# EAGLE board Temperature_sensor_Tiled (EAGLE 7.7.0)
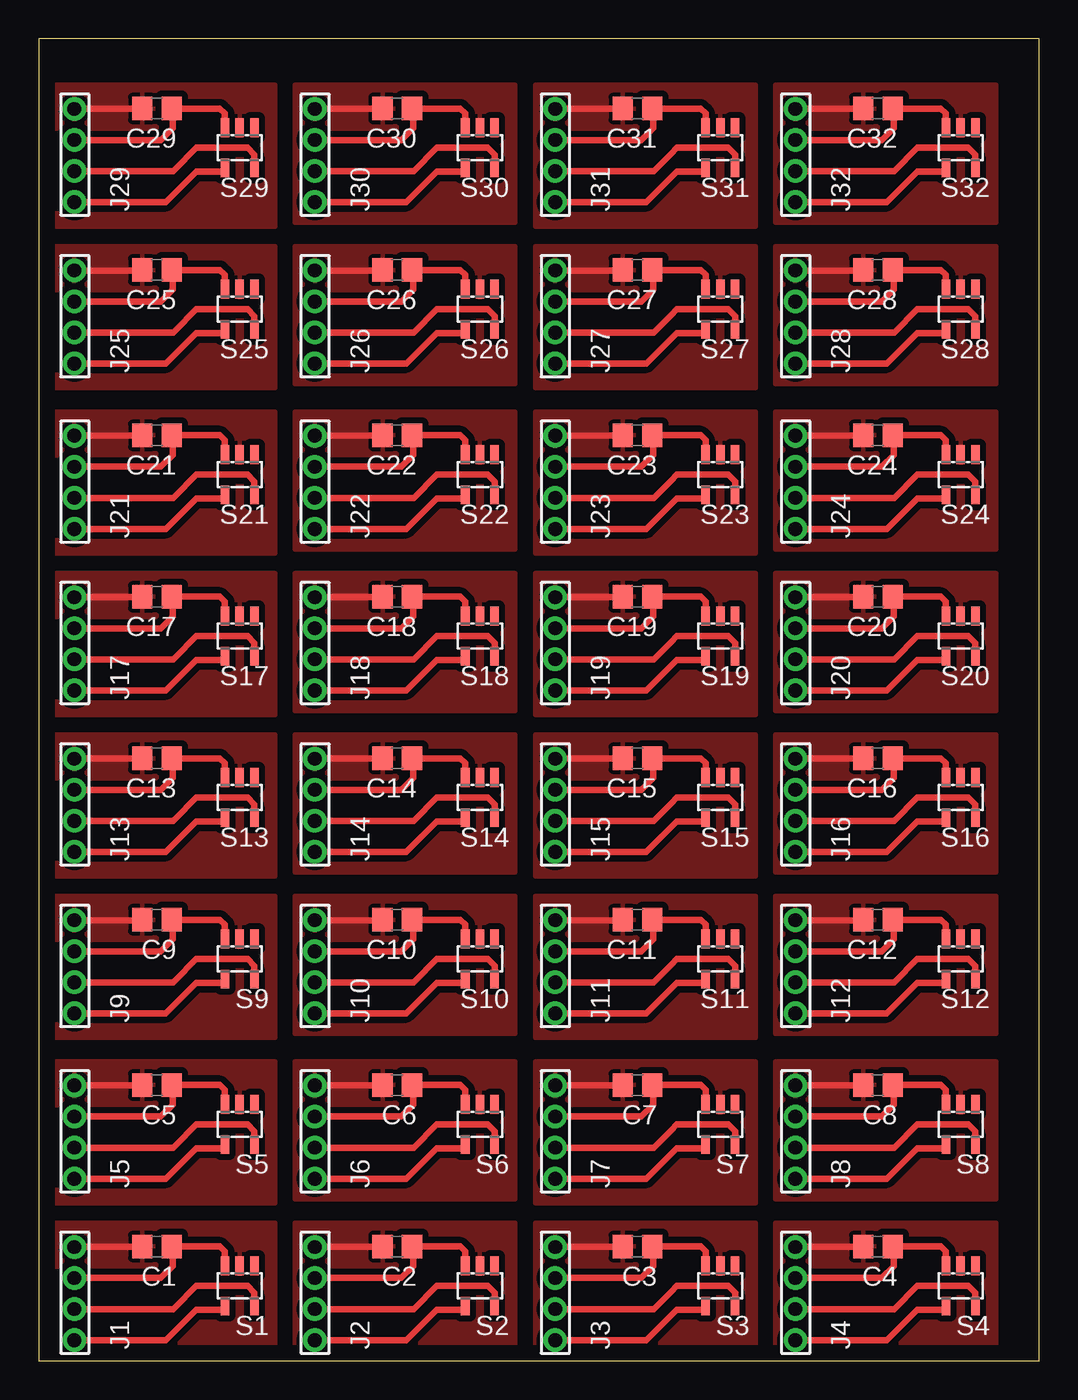
[diagram p0: board, top side]

Size 64.5 x 85.27 mm. Coordinates in mm from the lower left corner, seen from the top.
Outline: 0,0 64.5,0 64.5,85.27 0,85.27 0,0
Copper layers (1*16): Top 0.035mm / dielectric 1.5mm / Bottom 0.035mm
Design rules "default *": minimum track width 10mil, minimum drill 24mil, track to track 16mil, track to pad 14mil, pad to pad 14mil, via to via 14mil, smd to smd 14mil, copper to edge 40mil, drill to drill 8mil, minimum pad ring 10mil, minimum via ring 8mil, stop-mask expansion 4mil, vias tented up to drill 0mil, thermal gap 10mil

## Footprints (pad centres in the part's own frame; a part is rotated, then mirrored left to right if it is on the bottom)
C0805 = smd 1.3 x 1.5: 1 -0.95,0; 2 0.95,0
2MM_4PIN_LARGE = drill 0.9 pad 1.524: 2 -2.73,-0.27; 4 -0.73,-0.27; 6 1.27,-0.27; 8 3.27,-0.27
SOT23-5L = smd 0.55 x 1.2: 1 -0.95,-1.3; 2 0,-1.3; 3 0.95,-1.3; 4 0.95,1.3; 5 -0.95,1.3

## Placement (x,y rotation side)
C1  0.01uF  [C0805]  7.62,7.37 180 top
C2  0.01uF  [C0805]  23.11,7.37 180 top
C3  0.01uF  [C0805]  38.61,7.37 180 top
C4  0.01uF  [C0805]  54.1,7.37 180 top
C5  0.01uF  [C0805]  7.62,17.78 180 top
C6  0.01uF  [C0805]  23.11,17.78 180 top
C7  0.01uF  [C0805]  38.61,17.78 180 top
C8  0.01uF  [C0805]  54.1,17.78 180 top
C9  0.01uF  [C0805]  7.62,28.45 180 top
C10  0.01uF  [C0805]  23.11,28.45 180 top
C11  0.01uF  [C0805]  38.61,28.45 180 top
C12  0.01uF  [C0805]  54.1,28.45 180 top
C13  0.01uF  [C0805]  7.62,38.86 180 top
C14  0.01uF  [C0805]  23.11,38.86 180 top
C15  0.01uF  [C0805]  38.61,38.86 180 top
C16  0.01uF  [C0805]  54.1,38.86 180 top
C17  0.01uF  [C0805]  7.62,49.28 180 top
C18  0.01uF  [C0805]  23.11,49.28 180 top
C19  0.01uF  [C0805]  38.61,49.28 180 top
C20  0.01uF  [C0805]  54.1,49.28 180 top
C21  0.01uF  [C0805]  7.62,59.69 180 top
C22  0.01uF  [C0805]  23.11,59.69 180 top
C23  0.01uF  [C0805]  38.61,59.69 180 top
C24  0.01uF  [C0805]  54.1,59.69 180 top
C25  0.01uF  [C0805]  7.62,70.36 180 top
C26  0.01uF  [C0805]  23.11,70.36 180 top
C27  0.01uF  [C0805]  38.61,70.36 180 top
C28  0.01uF  [C0805]  54.1,70.36 180 top
C29  0.01uF  [C0805]  7.62,80.77 180 top
C30  0.01uF  [C0805]  23.11,80.77 180 top
C31  0.01uF  [C0805]  38.61,80.77 180 top
C32  0.01uF  [C0805]  54.1,80.77 180 top
J1  4_PIN_2MM  [2MM_4PIN_LARGE]  2.03,4.06 90 top
J2  4_PIN_2MM  [2MM_4PIN_LARGE]  17.53,4.06 90 top
J3  4_PIN_2MM  [2MM_4PIN_LARGE]  33.02,4.06 90 top
J4  4_PIN_2MM  [2MM_4PIN_LARGE]  48.51,4.06 90 top
J5  4_PIN_2MM  [2MM_4PIN_LARGE]  2.03,14.48 90 top
J6  4_PIN_2MM  [2MM_4PIN_LARGE]  17.53,14.48 90 top
J7  4_PIN_2MM  [2MM_4PIN_LARGE]  33.02,14.48 90 top
J8  4_PIN_2MM  [2MM_4PIN_LARGE]  48.51,14.48 90 top
J9  4_PIN_2MM  [2MM_4PIN_LARGE]  2.03,25.15 90 top
J10  4_PIN_2MM  [2MM_4PIN_LARGE]  17.53,25.15 90 top
J11  4_PIN_2MM  [2MM_4PIN_LARGE]  33.02,25.15 90 top
J12  4_PIN_2MM  [2MM_4PIN_LARGE]  48.51,25.15 90 top
J13  4_PIN_2MM  [2MM_4PIN_LARGE]  2.03,35.56 90 top
J14  4_PIN_2MM  [2MM_4PIN_LARGE]  17.53,35.56 90 top
J15  4_PIN_2MM  [2MM_4PIN_LARGE]  33.02,35.56 90 top
J16  4_PIN_2MM  [2MM_4PIN_LARGE]  48.51,35.56 90 top
J17  4_PIN_2MM  [2MM_4PIN_LARGE]  2.03,45.97 90 top
J18  4_PIN_2MM  [2MM_4PIN_LARGE]  17.53,45.97 90 top
J19  4_PIN_2MM  [2MM_4PIN_LARGE]  33.02,45.97 90 top
J20  4_PIN_2MM  [2MM_4PIN_LARGE]  48.51,45.97 90 top
J21  4_PIN_2MM  [2MM_4PIN_LARGE]  2.03,56.39 90 top
J22  4_PIN_2MM  [2MM_4PIN_LARGE]  17.53,56.39 90 top
J23  4_PIN_2MM  [2MM_4PIN_LARGE]  33.02,56.39 90 top
J24  4_PIN_2MM  [2MM_4PIN_LARGE]  48.51,56.39 90 top
J25  4_PIN_2MM  [2MM_4PIN_LARGE]  2.03,67.06 90 top
J26  4_PIN_2MM  [2MM_4PIN_LARGE]  17.53,67.06 90 top
J27  4_PIN_2MM  [2MM_4PIN_LARGE]  33.02,67.06 90 top
J28  4_PIN_2MM  [2MM_4PIN_LARGE]  48.51,67.06 90 top
J29  4_PIN_2MM  [2MM_4PIN_LARGE]  2.03,77.47 90 top
J30  4_PIN_2MM  [2MM_4PIN_LARGE]  17.53,77.47 90 top
J31  4_PIN_2MM  [2MM_4PIN_LARGE]  33.02,77.47 90 top
J32  4_PIN_2MM  [2MM_4PIN_LARGE]  48.51,77.47 90 top
S1  TC74  [SOT23-5L]  12.95,4.83 180 top
S2  TC74  [SOT23-5L]  28.45,4.83 180 top
S3  TC74  [SOT23-5L]  43.94,4.83 180 top
S4  TC74  [SOT23-5L]  59.44,4.83 180 top
S5  TC74  [SOT23-5L]  12.95,15.24 180 top
S6  TC74  [SOT23-5L]  28.45,15.24 180 top
S7  TC74  [SOT23-5L]  43.94,15.24 180 top
S8  TC74  [SOT23-5L]  59.44,15.24 180 top
S9  TC74  [SOT23-5L]  12.95,25.91 180 top
S10  TC74  [SOT23-5L]  28.45,25.91 180 top
S11  TC74  [SOT23-5L]  43.94,25.91 180 top
S12  TC74  [SOT23-5L]  59.44,25.91 180 top
S13  TC74  [SOT23-5L]  12.95,36.32 180 top
S14  TC74  [SOT23-5L]  28.45,36.32 180 top
S15  TC74  [SOT23-5L]  43.94,36.32 180 top
S16  TC74  [SOT23-5L]  59.44,36.32 180 top
S17  TC74  [SOT23-5L]  12.95,46.74 180 top
S18  TC74  [SOT23-5L]  28.45,46.74 180 top
S19  TC74  [SOT23-5L]  43.94,46.74 180 top
S20  TC74  [SOT23-5L]  59.44,46.74 180 top
S21  TC74  [SOT23-5L]  12.95,57.15 180 top
S22  TC74  [SOT23-5L]  28.45,57.15 180 top
S23  TC74  [SOT23-5L]  43.94,57.15 180 top
S24  TC74  [SOT23-5L]  59.44,57.15 180 top
S25  TC74  [SOT23-5L]  12.95,67.82 180 top
S26  TC74  [SOT23-5L]  28.45,67.82 180 top
S27  TC74  [SOT23-5L]  43.94,67.82 180 top
S28  TC74  [SOT23-5L]  59.44,67.82 180 top
S29  TC74  [SOT23-5L]  12.95,78.23 180 top
S30  TC74  [SOT23-5L]  28.45,78.23 180 top
S31  TC74  [SOT23-5L]  43.94,78.23 180 top
S32  TC74  [SOT23-5L]  59.44,78.23 180 top

## Library data of the parts
C1-C32 = rcl
J1-J32 S1-S32 = Mine

## Nets
GND: C1.2 J1.8 S1.2
GND1: C2.2 J2.8 S2.2
GND2: C3.2 J3.8 S3.2
GND3: C4.2 J4.8 S4.2
GND4: C5.2 J5.8 S5.2
GND5: C6.2 J6.8 S6.2
GND6: C7.2 J7.8 S7.2
GND7: C8.2 J8.8 S8.2
GND8: C9.2 J9.8 S9.2
GND9: C10.2 J10.8 S10.2
GND10: C11.2 J11.8 S11.2
GND11: C12.2 J12.8 S12.2
GND12: C13.2 J13.8 S13.2
GND13: C14.2 J14.8 S14.2
GND14: C15.2 J15.8 S15.2
GND15: C16.2 J16.8 S16.2
GND16: C17.2 J17.8 S17.2
GND17: C18.2 J18.8 S18.2
GND18: C19.2 J19.8 S19.2
GND19: C20.2 J20.8 S20.2
GND20: C21.2 J21.8 S21.2
GND21: C22.2 J22.8 S22.2
GND22: C23.2 J23.8 S23.2
GND23: C24.2 J24.8 S24.2
GND24: C25.2 J25.8 S25.2
GND25: C26.2 J26.8 S26.2
GND26: C27.2 J27.8 S27.2
GND27: C28.2 J28.8 S28.2
GND28: C29.2 J29.8 S29.2
GND29: C30.2 J30.8 S30.2
GND30: C31.2 J31.8 S31.2
GND31: C32.2 J32.8 S32.2
N$1: J2.4 S2.5
N$2: C1.1 J1.6 S1.3
N$3: J1.4 S1.5
N$4: J1.2 S1.4
N$5: J2.2 S2.4
N$6: C2.1 J2.6 S2.3
N$7: J3.4 S3.5
N$8: J3.2 S3.4
N$9: C3.1 J3.6 S3.3
N$10: J4.4 S4.5
N$11: J4.2 S4.4
N$12: C4.1 J4.6 S4.3
N$13: J5.4 S5.5
N$14: J5.2 S5.4
N$15: C5.1 J5.6 S5.3
N$16: J6.4 S6.5
N$17: J6.2 S6.4
N$18: C6.1 J6.6 S6.3
N$19: J7.4 S7.5
N$20: J7.2 S7.4
N$21: C7.1 J7.6 S7.3
N$22: J8.4 S8.5
N$23: J8.2 S8.4
N$24: C8.1 J8.6 S8.3
N$25: J9.4 S9.5
N$26: J9.2 S9.4
N$27: C9.1 J9.6 S9.3
N$28: J10.4 S10.5
N$29: J10.2 S10.4
N$30: C10.1 J10.6 S10.3
N$31: J11.4 S11.5
N$32: J11.2 S11.4
N$33: C11.1 J11.6 S11.3
N$34: J12.4 S12.5
N$35: J12.2 S12.4
N$36: C12.1 J12.6 S12.3
N$37: J13.4 S13.5
N$38: J13.2 S13.4
N$39: C13.1 J13.6 S13.3
N$40: J14.4 S14.5
N$41: J14.2 S14.4
N$42: C14.1 J14.6 S14.3
N$43: J15.4 S15.5
N$44: J15.2 S15.4
N$45: C15.1 J15.6 S15.3
N$46: J16.4 S16.5
N$47: J16.2 S16.4
N$48: C16.1 J16.6 S16.3
N$49: J17.4 S17.5
N$50: J17.2 S17.4
N$51: C17.1 J17.6 S17.3
N$52: J18.4 S18.5
N$53: J18.2 S18.4
N$54: C18.1 J18.6 S18.3
N$55: J19.4 S19.5
N$56: J19.2 S19.4
N$57: C19.1 J19.6 S19.3
N$58: J20.4 S20.5
N$59: J20.2 S20.4
N$60: C20.1 J20.6 S20.3
N$61: J21.4 S21.5
N$62: J21.2 S21.4
N$63: C21.1 J21.6 S21.3
N$64: J22.4 S22.5
N$65: J22.2 S22.4
N$66: C22.1 J22.6 S22.3
N$67: J23.4 S23.5
N$68: J23.2 S23.4
N$69: C23.1 J23.6 S23.3
N$70: J24.4 S24.5
N$71: J24.2 S24.4
N$72: C24.1 J24.6 S24.3
N$73: J25.4 S25.5
N$74: J25.2 S25.4
N$75: C25.1 J25.6 S25.3
N$76: J26.4 S26.5
N$77: J26.2 S26.4
N$78: C26.1 J26.6 S26.3
N$79: J27.4 S27.5
N$80: J27.2 S27.4
N$81: C27.1 J27.6 S27.3
N$82: J28.4 S28.5
N$83: J28.2 S28.4
N$84: C28.1 J28.6 S28.3
N$85: J29.4 S29.5
N$86: J29.2 S29.4
N$87: C29.1 J29.6 S29.3
N$88: J30.4 S30.5
N$89: J30.2 S30.4
N$90: C30.1 J30.6 S30.3
N$91: J31.4 S31.5
N$92: J31.2 S31.4
N$93: C31.1 J31.6 S31.3
N$94: J32.4 S32.5
N$95: J32.2 S32.4
N$96: C32.1 J32.6 S32.3

## Tracks (layer width: path | path; a pad name or v marks a point on that pad's centre or on a via)
GND
  Top 0.406: J1.8 6.67,7.33 C1.2
  pour Top: 1.02,8.89 15.24,8.89 15.24,-0.25 1.02,-0.25
GND1
  Top 0.406: J2.8 22.16,7.33 C2.2
  pour Top: 16.51,8.89 30.73,8.89 30.73,0 16.51,0
GND2
  Top 0.406: J3.8 37.66,7.33 C3.2
  pour Top: 32,8.89 46.23,8.89 46.23,-0.25 32,-0.25
GND3
  Top 0.406: J4.8 53.15,7.33 C4.2
  pour Top: 47.5,8.89 61.72,8.89 61.72,0 47.5,0
GND4
  Top 0.406: J5.8 6.67,17.75 C5.2
  pour Top: 1.02,19.3 15.24,19.3 15.24,10.16 1.02,10.16
GND5
  Top 0.406: J6.8 22.16,17.75 C6.2
  pour Top: 16.51,19.3 30.73,19.3 30.73,10.41 16.51,10.41
GND6
  Top 0.406: J7.8 37.66,17.75 C7.2
  pour Top: 32,19.3 46.23,19.3 46.23,10.16 32,10.16
GND7
  Top 0.406: J8.8 53.15,17.75 C8.2
  pour Top: 47.5,19.3 61.72,19.3 61.72,10.41 47.5,10.41
GND8
  Top 0.406: J9.8 6.67,28.42 C9.2
  pour Top: 1.02,29.97 15.24,29.97 15.24,20.83 1.02,20.83
GND9
  Top 0.406: J10.8 22.16,28.42 C10.2
  pour Top: 16.51,29.97 30.73,29.97 30.73,21.08 16.51,21.08
GND10
  Top 0.406: J11.8 37.66,28.42 C11.2
  pour Top: 32,29.97 46.23,29.97 46.23,20.83 32,20.83
GND11
  Top 0.406: J12.8 53.15,28.42 C12.2
  pour Top: 47.5,29.97 61.72,29.97 61.72,21.08 47.5,21.08
GND12
  Top 0.406: J13.8 6.67,38.83 C13.2
  pour Top: 1.02,40.39 15.24,40.39 15.24,31.24 1.02,31.24
GND13
  Top 0.406: J14.8 22.16,38.83 C14.2
  pour Top: 16.51,40.39 30.73,40.39 30.73,31.5 16.51,31.5
GND14
  Top 0.406: J15.8 37.66,38.83 C15.2
  pour Top: 32,40.39 46.23,40.39 46.23,31.24 32,31.24
GND15
  Top 0.406: J16.8 53.15,38.83 C16.2
  pour Top: 47.5,40.39 61.72,40.39 61.72,31.5 47.5,31.5
GND16
  Top 0.406: J17.8 6.67,49.24 C17.2
  pour Top: 1.02,50.8 15.24,50.8 15.24,41.66 1.02,41.66
GND17
  Top 0.406: J18.8 22.16,49.24 C18.2
  pour Top: 16.51,50.8 30.73,50.8 30.73,41.91 16.51,41.91
GND18
  Top 0.406: J19.8 37.66,49.24 C19.2
  pour Top: 32,50.8 46.23,50.8 46.23,41.66 32,41.66
GND19
  Top 0.406: J20.8 53.15,49.24 C20.2
  pour Top: 47.5,50.8 61.72,50.8 61.72,41.91 47.5,41.91
GND20
  Top 0.406: J21.8 6.67,59.66 C21.2
  pour Top: 1.02,61.21 15.24,61.21 15.24,52.07 1.02,52.07
GND21
  Top 0.406: J22.8 22.16,59.66 C22.2
  pour Top: 16.51,61.21 30.73,61.21 30.73,52.32 16.51,52.32
GND22
  Top 0.406: J23.8 37.66,59.66 C23.2
  pour Top: 32,61.21 46.23,61.21 46.23,52.07 32,52.07
GND23
  Top 0.406: J24.8 53.15,59.66 C24.2
  pour Top: 47.5,61.21 61.72,61.21 61.72,52.32 47.5,52.32
GND24
  Top 0.406: J25.8 6.67,70.33 C25.2
  pour Top: 1.02,71.88 15.24,71.88 15.24,62.74 1.02,62.74
GND25
  Top 0.406: J26.8 22.16,70.33 C26.2
  pour Top: 16.51,71.88 30.73,71.88 30.73,62.99 16.51,62.99
GND26
  Top 0.406: J27.8 37.66,70.33 C27.2
  pour Top: 32,71.88 46.23,71.88 46.23,62.74 32,62.74
GND27
  Top 0.406: J28.8 53.15,70.33 C28.2
  pour Top: 47.5,71.88 61.72,71.88 61.72,62.99 47.5,62.99
GND28
  Top 0.406: J29.8 6.67,80.74 C29.2
  pour Top: 1.02,82.3 15.24,82.3 15.24,73.15 1.02,73.15
GND29
  Top 0.406: J30.8 22.16,80.74 C30.2
  pour Top: 16.51,82.3 30.73,82.3 30.73,73.41 16.51,73.41
GND30
  Top 0.406: J31.8 37.66,80.74 C31.2
  pour Top: 32,82.3 46.23,82.3 46.23,73.15 32,73.15
GND31
  Top 0.406: J32.8 53.15,80.74 C32.2
  pour Top: 47.5,82.3 61.72,82.3 61.72,73.41 47.5,73.41
N$1
  Top 0.406: S2.5 29.4,4.38 28.96,4.83 25.65,4.83 24.16,3.33 J2.4
N$2
  Top 0.406: J1.6 7.87,5.33 8.64,6.1 8.64,7.3 C1.1 11.68,7.37 12,7.05 S1.3
N$3
  Top 0.406: S1.5 13.9,4.38 13.46,4.83 10.16,4.83 9.78,4.45 9.14,3.81 8.67,3.33 J1.4
N$4
  Top 0.406: S1.4 11.78,3.3 10.16,3.3 8.19,1.33 J1.2
N$5
  Top 0.406: S2.4 27.27,3.3 25.65,3.3 23.69,1.33 J2.2
N$6
  Top 0.406: J2.6 23.37,5.33 24.13,6.1 24.13,7.3 C2.1 27.18,7.37 27.5,7.05 S2.3
N$7
  Top 0.406: S3.5 44.89,4.38 44.45,4.83 41.15,4.83 40.77,4.45 40.13,3.81 39.66,3.33 J3.4
N$8
  Top 0.406: S3.4 42.77,3.3 41.15,3.3 39.18,1.33 J3.2
N$9
  Top 0.406: J3.6 38.86,5.33 39.62,6.1 39.62,7.3 C3.1 42.67,7.37 42.99,7.05 S3.3
N$10
  Top 0.406: S4.5 60.39,4.38 59.94,4.83 56.64,4.83 55.15,3.33 J4.4
N$11
  Top 0.406: S4.4 58.26,3.3 56.64,3.3 54.67,1.33 J4.2
N$12
  Top 0.406: J4.6 54.36,5.33 55.12,6.1 55.12,7.3 C4.1 58.17,7.37 58.49,7.05 S4.3
N$13
  Top 0.406: S5.5 13.9,14.8 13.46,15.24 10.16,15.24 9.78,14.86 9.14,14.22 8.67,13.75 J5.4
N$14
  Top 0.406: S5.4 11.78,13.72 10.16,13.72 8.19,11.75 J5.2
N$15
  Top 0.406: J5.6 7.87,15.75 8.64,16.51 8.64,17.71 C5.1 11.68,17.78 12,17.46 S5.3
N$16
  Top 0.406: S6.5 29.4,14.8 28.96,15.24 25.65,15.24 24.16,13.75 J6.4
N$17
  Top 0.406: S6.4 27.27,13.72 25.65,13.72 23.69,11.75 J6.2
N$18
  Top 0.406: J6.6 23.37,15.75 24.13,16.51 24.13,17.71 C6.1 27.18,17.78 27.5,17.46 S6.3
N$19
  Top 0.406: S7.5 44.89,14.8 44.45,15.24 41.15,15.24 40.77,14.86 40.13,14.22 39.66,13.75 J7.4
N$20
  Top 0.406: S7.4 42.77,13.72 41.15,13.72 39.18,11.75 J7.2
N$21
  Top 0.406: J7.6 38.86,15.75 39.62,16.51 39.62,17.71 C7.1 42.67,17.78 42.99,17.46 S7.3
N$22
  Top 0.406: S8.5 60.39,14.8 59.94,15.24 56.64,15.24 55.15,13.75 J8.4
N$23
  Top 0.406: S8.4 58.26,13.72 56.64,13.72 54.67,11.75 J8.2
N$24
  Top 0.406: J8.6 54.36,15.75 55.12,16.51 55.12,17.71 C8.1 58.17,17.78 58.49,17.46 S8.3
N$25
  Top 0.406: S9.5 13.9,25.47 13.46,25.91 10.16,25.91 9.78,25.53 9.14,24.89 8.67,24.42 J9.4
N$26
  Top 0.406: S9.4 11.78,24.38 10.16,24.38 8.19,22.42 J9.2
N$27
  Top 0.406: J9.6 7.87,26.42 8.64,27.18 8.64,28.38 C9.1 11.68,28.45 12,28.13 S9.3
N$28
  Top 0.406: S10.5 29.4,25.47 28.96,25.91 25.65,25.91 24.16,24.42 J10.4
N$29
  Top 0.406: S10.4 27.27,24.38 25.65,24.38 23.69,22.42 J10.2
N$30
  Top 0.406: J10.6 23.37,26.42 24.13,27.18 24.13,28.38 C10.1 27.18,28.45 27.5,28.13 S10.3
N$31
  Top 0.406: S11.5 44.89,25.47 44.45,25.91 41.15,25.91 40.77,25.53 40.13,24.89 39.66,24.42 J11.4
N$32
  Top 0.406: S11.4 42.77,24.38 41.15,24.38 39.18,22.42 J11.2
N$33
  Top 0.406: J11.6 38.86,26.42 39.62,27.18 39.62,28.38 C11.1 42.67,28.45 42.99,28.13 S11.3
N$34
  Top 0.406: S12.5 60.39,25.47 59.94,25.91 56.64,25.91 55.15,24.42 J12.4
N$35
  Top 0.406: S12.4 58.26,24.38 56.64,24.38 54.67,22.42 J12.2
N$36
  Top 0.406: J12.6 54.36,26.42 55.12,27.18 55.12,28.38 C12.1 58.17,28.45 58.49,28.13 S12.3
N$37
  Top 0.406: S13.5 13.9,35.88 13.46,36.32 10.16,36.32 9.78,35.94 9.14,35.31 8.67,34.83 J13.4
N$38
  Top 0.406: S13.4 11.78,34.8 10.16,34.8 8.19,32.83 J13.2
N$39
  Top 0.406: J13.6 7.87,36.83 8.64,37.59 8.64,38.8 C13.1 11.68,38.86 12,38.54 S13.3
N$40
  Top 0.406: S14.5 29.4,35.88 28.96,36.32 25.65,36.32 24.16,34.83 J14.4
N$41
  Top 0.406: S14.4 27.27,34.8 25.65,34.8 23.69,32.83 J14.2
N$42
  Top 0.406: J14.6 23.37,36.83 24.13,37.59 24.13,38.8 C14.1 27.18,38.86 27.5,38.54 S14.3
N$43
  Top 0.406: S15.5 44.89,35.88 44.45,36.32 41.15,36.32 40.77,35.94 40.13,35.31 39.66,34.83 J15.4
N$44
  Top 0.406: S15.4 42.77,34.8 41.15,34.8 39.18,32.83 J15.2
N$45
  Top 0.406: J15.6 38.86,36.83 39.62,37.59 39.62,38.8 C15.1 42.67,38.86 42.99,38.54 S15.3
N$46
  Top 0.406: S16.5 60.39,35.88 59.94,36.32 56.64,36.32 55.15,34.83 J16.4
N$47
  Top 0.406: S16.4 58.26,34.8 56.64,34.8 54.67,32.83 J16.2
N$48
  Top 0.406: J16.6 54.36,36.83 55.12,37.59 55.12,38.8 C16.1 58.17,38.86 58.49,38.54 S16.3
N$49
  Top 0.406: S17.5 13.9,46.29 13.46,46.74 10.16,46.74 9.78,46.35 9.14,45.72 8.67,45.24 J17.4
N$50
  Top 0.406: S17.4 11.78,45.21 10.16,45.21 8.19,43.24 J17.2
N$51
  Top 0.406: J17.6 7.87,47.24 8.64,48.01 8.64,49.21 C17.1 11.68,49.28 12,48.96 S17.3
N$52
  Top 0.406: S18.5 29.4,46.29 28.96,46.74 25.65,46.74 24.16,45.24 J18.4
N$53
  Top 0.406: S18.4 27.27,45.21 25.65,45.21 23.69,43.24 J18.2
N$54
  Top 0.406: J18.6 23.37,47.24 24.13,48.01 24.13,49.21 C18.1 27.18,49.28 27.5,48.96 S18.3
N$55
  Top 0.406: S19.5 44.89,46.29 44.45,46.74 41.15,46.74 40.77,46.35 40.13,45.72 39.66,45.24 J19.4
N$56
  Top 0.406: S19.4 42.77,45.21 41.15,45.21 39.18,43.24 J19.2
N$57
  Top 0.406: J19.6 38.86,47.24 39.62,48.01 39.62,49.21 C19.1 42.67,49.28 42.99,48.96 S19.3
N$58
  Top 0.406: S20.5 60.39,46.29 59.94,46.74 56.64,46.74 55.15,45.24 J20.4
N$59
  Top 0.406: S20.4 58.26,45.21 56.64,45.21 54.67,43.24 J20.2
N$60
  Top 0.406: J20.6 54.36,47.24 55.12,48.01 55.12,49.21 C20.1 58.17,49.28 58.49,48.96 S20.3
N$61
  Top 0.406: S21.5 13.9,56.71 13.46,57.15 10.16,57.15 9.78,56.77 9.14,56.13 8.67,55.66 J21.4
N$62
  Top 0.406: S21.4 11.78,55.63 10.16,55.63 8.19,53.66 J21.2
N$63
  Top 0.406: J21.6 7.87,57.66 8.64,58.42 8.64,59.62 C21.1 11.68,59.69 12,59.37 S21.3
N$64
  Top 0.406: S22.5 29.4,56.71 28.96,57.15 25.65,57.15 24.16,55.66 J22.4
N$65
  Top 0.406: S22.4 27.27,55.63 25.65,55.63 23.69,53.66 J22.2
N$66
  Top 0.406: J22.6 23.37,57.66 24.13,58.42 24.13,59.62 C22.1 27.18,59.69 27.5,59.37 S22.3
N$67
  Top 0.406: S23.5 44.89,56.71 44.45,57.15 41.15,57.15 40.77,56.77 40.13,56.13 39.66,55.66 J23.4
N$68
  Top 0.406: S23.4 42.77,55.63 41.15,55.63 39.18,53.66 J23.2
N$69
  Top 0.406: J23.6 38.86,57.66 39.62,58.42 39.62,59.62 C23.1 42.67,59.69 42.99,59.37 S23.3
N$70
  Top 0.406: S24.5 60.39,56.71 59.94,57.15 56.64,57.15 55.15,55.66 J24.4
N$71
  Top 0.406: S24.4 58.26,55.63 56.64,55.63 54.67,53.66 J24.2
N$72
  Top 0.406: J24.6 54.36,57.66 55.12,58.42 55.12,59.62 C24.1 58.17,59.69 58.49,59.37 S24.3
N$73
  Top 0.406: S25.5 13.9,67.38 13.46,67.82 10.16,67.82 9.78,67.44 9.14,66.8 8.67,66.33 J25.4
N$74
  Top 0.406: S25.4 11.78,66.29 10.16,66.29 8.19,64.33 J25.2
N$75
  Top 0.406: J25.6 7.87,68.33 8.64,69.09 8.64,70.29 C25.1 11.68,70.36 12,70.04 S25.3
N$76
  Top 0.406: S26.5 29.4,67.38 28.96,67.82 25.65,67.82 24.16,66.33 J26.4
N$77
  Top 0.406: S26.4 27.27,66.29 25.65,66.29 23.69,64.33 J26.2
N$78
  Top 0.406: J26.6 23.37,68.33 24.13,69.09 24.13,70.29 C26.1 27.18,70.36 27.5,70.04 S26.3
N$79
  Top 0.406: S27.5 44.89,67.38 44.45,67.82 41.15,67.82 40.77,67.44 40.13,66.8 39.66,66.33 J27.4
N$80
  Top 0.406: S27.4 42.77,66.29 41.15,66.29 39.18,64.33 J27.2
N$81
  Top 0.406: J27.6 38.86,68.33 39.62,69.09 39.62,70.29 C27.1 42.67,70.36 42.99,70.04 S27.3
N$82
  Top 0.406: S28.5 60.39,67.38 59.94,67.82 56.64,67.82 55.15,66.33 J28.4
N$83
  Top 0.406: S28.4 58.26,66.29 56.64,66.29 54.67,64.33 J28.2
N$84
  Top 0.406: J28.6 54.36,68.33 55.12,69.09 55.12,70.29 C28.1 58.17,70.36 58.49,70.04 S28.3
N$85
  Top 0.406: S29.5 13.9,77.79 13.46,78.23 10.16,78.23 9.78,77.85 9.14,77.22 8.67,76.74 J29.4
N$86
  Top 0.406: S29.4 11.78,76.71 10.16,76.71 8.19,74.74 J29.2
N$87
  Top 0.406: J29.6 7.87,78.74 8.64,79.5 8.64,80.71 C29.1 11.68,80.77 12,80.45 S29.3
N$88
  Top 0.406: S30.5 29.4,77.79 28.96,78.23 25.65,78.23 24.16,76.74 J30.4
N$89
  Top 0.406: S30.4 27.27,76.71 25.65,76.71 23.69,74.74 J30.2
N$90
  Top 0.406: J30.6 23.37,78.74 24.13,79.5 24.13,80.71 C30.1 27.18,80.77 27.5,80.45 S30.3
N$91
  Top 0.406: S31.5 44.89,77.79 44.45,78.23 41.15,78.23 40.77,77.85 40.13,77.22 39.66,76.74 J31.4
N$92
  Top 0.406: S31.4 42.77,76.71 41.15,76.71 39.18,74.74 J31.2
N$93
  Top 0.406: J31.6 38.86,78.74 39.62,79.5 39.62,80.71 C31.1 42.67,80.77 42.99,80.45 S31.3
N$94
  Top 0.406: S32.5 60.39,77.79 59.94,78.23 56.64,78.23 55.15,76.74 J32.4
N$95
  Top 0.406: S32.4 58.26,76.71 56.64,76.71 54.67,74.74 J32.2
N$96
  Top 0.406: J32.6 54.36,78.74 55.12,79.5 55.12,80.71 C32.1 58.17,80.77 58.49,80.45 S32.3